# Altium PCB wisp-6-dipole.PcbDoc
Units mil, origin at the board's own origin, x right, y up, seen from the top; angles counter-clockwise.
Board outline 1330 x 5829.72 mil, 4 copper layers (Top Layer, Mid-Layer 1, Mid-Layer 2, Bottom Layer); 84 components, 66 nets, 281 pads, 89 vias.
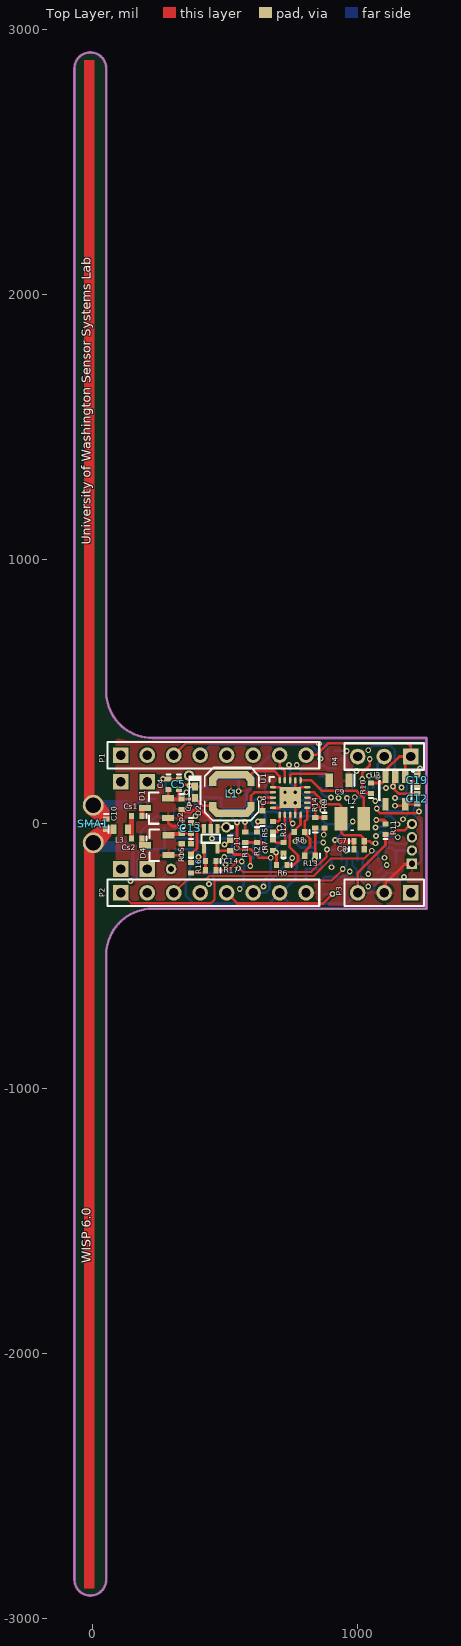
[diagram p0: Top Layer view]
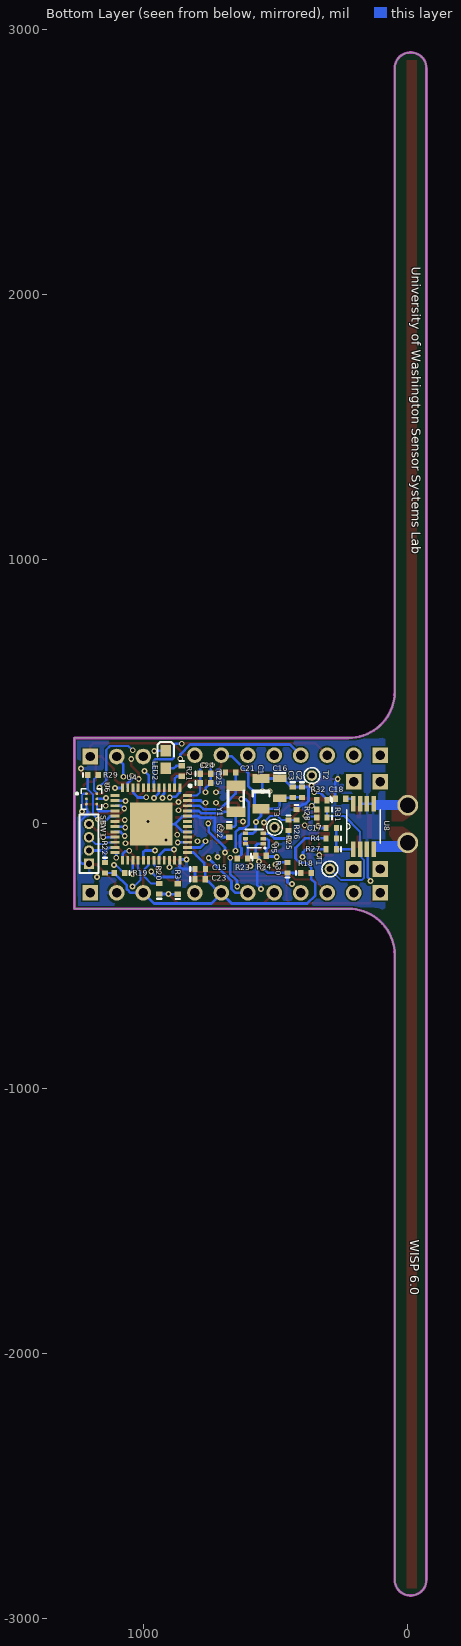
[diagram p1: Bottom Layer view, seen from below]
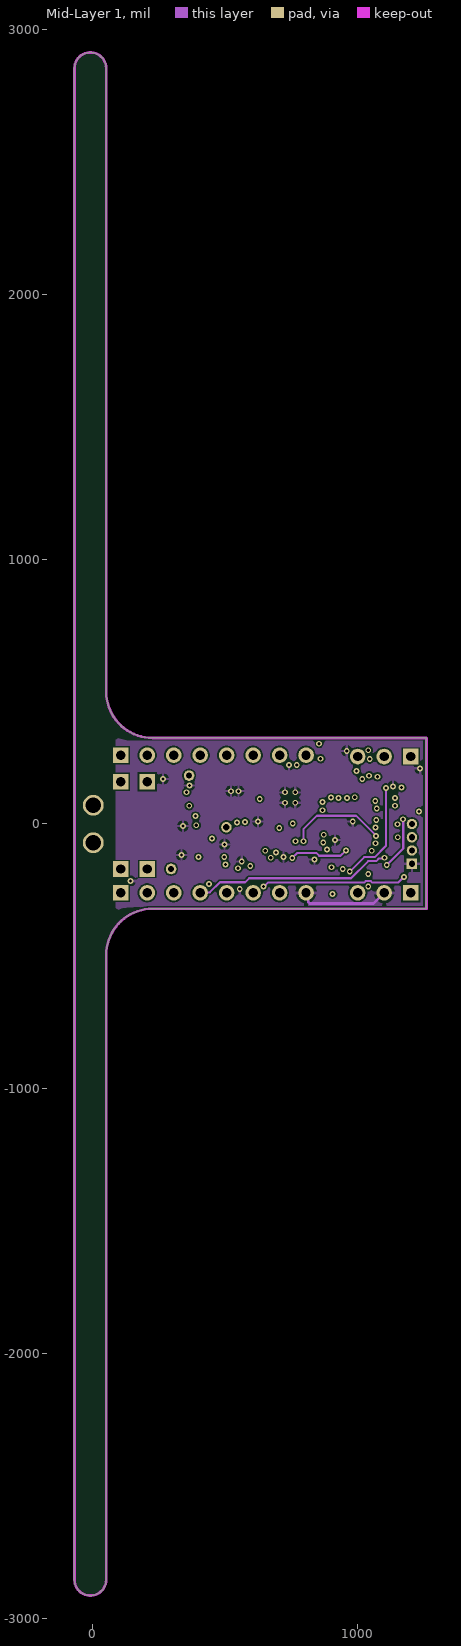
[diagram p2: Mid-Layer 1]
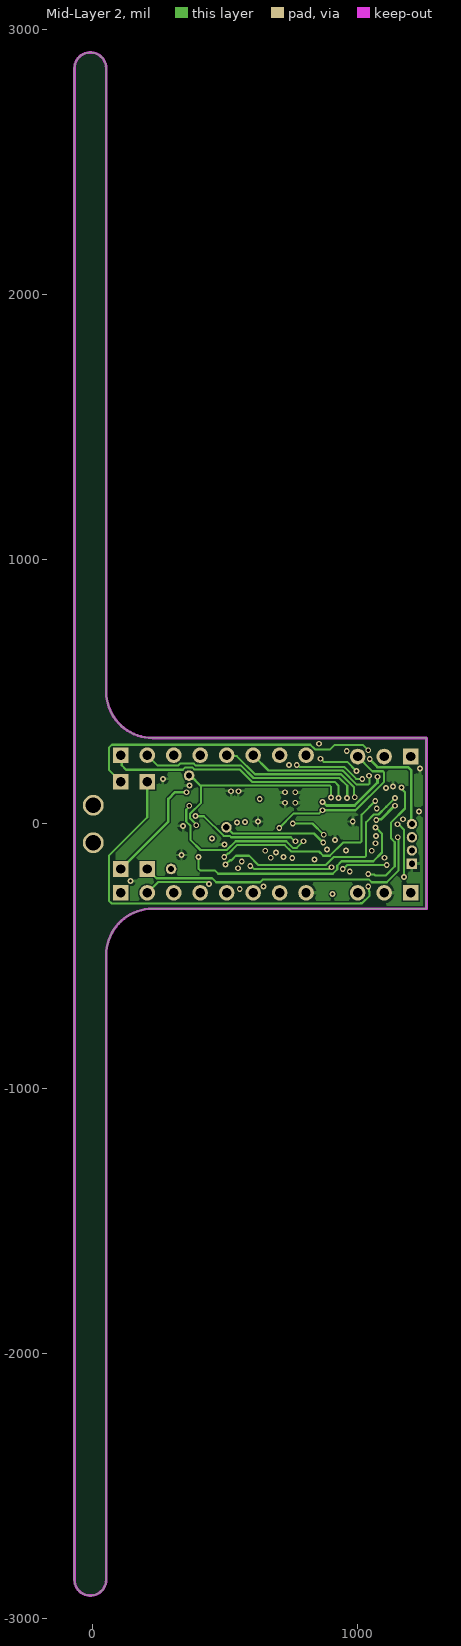
[diagram p3: Mid-Layer 2]

## Layer stack, top to bottom
Top Solder: solder mask 0.4, Solder Resist, Dk 3.5
Top Layer: signal copper 1.4
Dielectric 1: dielectric 12.6, FR-4, Dk 4.8
Mid-Layer 1: signal copper 1.4
Dielectric3: dielectric 12.6, FR-4, Dk 4.8
Mid-Layer 2: signal copper 1.4
Dielectric2: dielectric 12.6, FR-4, Dk 4.8
Bottom Layer: signal copper 1.4
Bottom Solder: solder mask 0.4, Solder Resist, Dk 3.5

## Board outline
-70,-2855 -70,2855 cw(c-10,2855) 50,2855 50,500 ccw(c225,500) 225,325 1260,325 1260,-320 225,-320 ccw(c225,-495) 50,-495 50,-2855 cw(c-10,-2855)

## Design rules (kind name [scope] priority, off if disabled: settings)
BoardOutlineClearance BoardOutlineClearance_1 [(OnLayer('Bottom Overlay') AND OnLayer('Top Overlay'))] p1: gap=8.5 ignorepadtopadclearanceinfootprint=FALSE except(5: Track-OutlineEdge Track-CavityEdge Track-CutoutEdge Track-SplitBarrior Track-SplitContinuation Text-OutlineEdge Text-CavityEdge Text-CutoutEdge Text-SplitBarrior Text-SplitContinuation)
BoardOutlineClearance [Not OnLayer('Bottom Overlay') AND  Not OnLayer('Top Overlay')] p2: gap=8.5 ignorepadtopadclearanceinfootprint=FALSE except(5: Text-OutlineEdge Text-CavityEdge Text-CutoutEdge Text-SplitBarrior Text-SplitContinuation)
Clearance [All] p1: gap=5.98 ignorepadtopadclearanceinfootprint=FALSE except(0: Arc-Hole Track-Hole SMDPad-Hole THPad-Hole Via-Hole Fill-Hole Poly-Hole Region-Hole Text-Hole; 6: SMDPad-SMDPad)
HoleSize [All] p1: absolutevalues=TRUE maxlimit=248.03 minlimit=7.87 maxpercent=80.000 minpercent=20.000
MinimumSolderMaskSliver [All] p1: minsoldermaskwidth=0.59
PolygonConnect [All] p1: connectstyle=Relief reliefconductorwidth=10 reliefentries=4 polygonreliefangle="90 Angle" airgapwidth=10
RoutingVias [All] p1: holewidth=8 width=20 viastyle="Through Hole" minholewidth=8 minwidth=20 maxholewidth=28 maxwidth=50
SilkToSilkClearance [All] p1: silktosilkclearance=0
SilkToSolderMaskClearance [IsPad] p1: minsilkscreentomaskgap=0 clearancetoexposedcopper=TRUE
SolderMaskExpansion [All] p1: expansion=4 istentingtop=FALSE
SupplyNets "Schematic Supply Nets_6" [InNet('3V3')] p1: voltage=0.000
SupplyNets "Schematic Supply Nets_5" [InNet('SENSOR_PWR')] p2: voltage=0.000
SupplyNets "Schematic Supply Nets_4" [InNet('GND')] p3: voltage=0.000
SupplyNets "Schematic Supply Nets_3" [InNet('VBOOST')] p4: voltage=0.000
SupplyNets "Schematic Supply Nets_2" [InNet('2V2')] p5: voltage=0.000
SupplyNets "Schematic Supply Nets_1" [InNet('VREG')] p6: voltage=0.000
SupplyNets "Schematic Supply Nets" [InNet('3V3RF')] p7: voltage=0.000
Width [All] p1: maxlimit=20 minlimit=7 preferedwidth=10
26 further rules are at their usual default settings.

## Classes and differential pairs
component class wisp-6-main: P1 P2 P3 P4 R3 R20
component class U_wisp-6-peripherals: R23 R24 R25 R26 R29 R30 U5 U6
component class U_wisp-6-mcu: C15 C21 C22 C23 C24 C25 LED2 R18 R19 R21 R22 R28 R31 R32 SBW1 U4 Y1
component class U_wisp-6-afe: C1 C2 C3 C4 C5 C6 C7 C8 C9 C10 C11 C12 C13 C14 C16 C17 C18 C19 Cp1 Cp2 Cs1 Cs2 D1 D2 D4 L1 L2 L3 R1 R2 R4 R5 R6 R7 R8 R9 R10 R11 R12 R13 R14 R15 R16 R17 R27 SMA1 T1 T2 T3 U1 U2 U3 U8

## Components (designator, comment, footprint, x,y, rotation, side; value= is the part's Value field where it differs from the comment)
C1 "Generic ceramic capacitor" 1206 555,115 r270 bottom value=220uF
C2 "Generic ceramic capacitor" 0402 400,120.31 r270 bottom value=4.7uF
C3 "Generic ceramic capacitor" 0402 435,120.31 r270 bottom value=0.1uF
C4 "Generic ceramic capacitor" 0402 285,150 r270 top value=0.1uF
C5 "Generic ceramic capacitor" 0402 325,150 r270 top value=4.7uF
C6 "Generic ceramic capacitor" 0402 640,30 r90 top value=10nF
C7 "Generic ceramic capacitor" 0402 1005.31,-65 r0 top value=22uF
C8 "Generic capacitor" 0402 1005.31,-95 r0 top value=DNP
C9 "Generic ceramic capacitor" 0805 930,165 r180 top value=100uF
C10 "Generic capacitor" 0402 50,-0.31 r270 top value=1.2pF
C11 "Generic ceramic capacitor" 0402 519,-81 r270 top value=0.1uF
C12 "Generic ceramic capacitor" 0402 1225,95 r270 top value=1uF
C13 "Generic capacitor" 0402 370,-15.32 r270 top value=33pF
C14 "Generic ceramic capacitor" 0402 445,-140 r180 top value=1nF
C15 "Generic ceramic capacitor" 0402 785,-170 r180 bottom value=0.1uF
C16 "Generic ceramic capacitor" 0805 485,135 r270 bottom value=100uF
C17 "Generic ceramic capacitor" 0402 290,-15 r0 bottom value=0.1uF
C18 "Generic capacitor" 0402 255,95 r180 bottom value=3.3nF
C19 "Generic ceramic capacitor" 0402 1225,165.31 r270 top value=1uF
C21 "Generic ceramic capacitor" 0402 670,195 r180 bottom value=10pF
C22 "Generic ceramic capacitor" 0402 675,-30 r270 bottom value=10pF
C23 "Generic ceramic capacitor" 0402 785.15,-208.85 r180 bottom value=1uF
C24 "Generic ceramic capacitor" 0402 765,190 r180 bottom value=0.1uF
C25 "Generic ceramic capacitor" 0402 765,155 r180 bottom value=1uF
Cp1 "Generic capacitor" 0402 335,75 r270 top value=33pF
Cp2 "Generic capacitor" 0402 335,-55 r270 top value=10pF
Cs1 "Generic capacitor" 0402 165,30 r180 top value=33pF
Cs2 "Generic capacitor" 0402 165,-55 r180 top value=1pF
D1 "SMS7630-005LF" "SOT23 - N" 240,60 r180 top value=1V
D2 "Generic diode - zener" Zener_SOD-523 385,120 r180 top value=DNP
D4 "SMS7630-005LF" "SOT23 - N" 240.95,-80 r180 top value=1V
L1 "SMT shielded inductor" LPS4018 520,105 r180 top value=22uH
L2 "SMT shielded inductor" IND1008 980,20 r180 top value=10uH
L3 "Generic inductor" 0603 105,-20 r0 top value=16nH
LED2 "Generic LED" "Diode - 0603" 915,243.46 r270 bottom value=1.9V
P1 "Header 8" HDR1X8 105,260 r0 top value=DNP
P2 "Header 8" HDR1X8 105,-260 r0 top value=DNP
P3 "Header 3" HDR1X3 1200,-260 r180 top value=DNP
P4 "Header 3" HDR1X3 1200,255 r180 top value=DNP
R1 "Generic resistor" 0402 575,-50 r90 top value=DNP
R2 "Generic resistor" 0402 620,-49.68 r270 top value=0
R3 "Generic resistor" 0402 870,-245.32 r90 bottom value=0
R4 "Generic resistor" 0402 290,-55 r0 bottom value=DNP
R5 "Generic resistor" 0402 680,-10.32 r90 top value=0
R6 "Generic resistor" 0402 713.21,-155 r180 top value=2M
R7 "Generic resistor" 0402 680,-80 r270 top value=7.5M
R8 "Generic resistor" 0402 780.31,-30 r180 top value=7.5M
R9 "Generic resistor" 0402 875,5 r270 top value=8.2M
R10 "Generic resistor" 0402 1050,135 r90 top value=DNP
R11 "Generic resistor" 0402 1105,-19.68 r90 top value=0
R12 "Generic resistor" 0402 720,-90 r90 top value=5.49M
R13 "Generic resistor" 0402 820,-120 r180 top value=4.12M
R14 "Generic resistor" 0402 840,5 r90 top value=4.75M
R15 "Generic resistor" 0402 370,-94.69 r270 top value=560k
R16 "Generic resistor" 0402 370,-165 r270 top value=22k
R17 "Generic resistor" 0402 445,-175 r180 top value=220k
R18 "Generic resistor" 0402 385.32,-185 r180 bottom value=4.7k
R19 "Generic resistor" 0402 1090,-185 r0 bottom value=4.7k
R20 "Generic resistor" 0402 940,-245 r90 bottom value=DNP
R21 "Generic resistor" 0402 855,200 r270 bottom value=33
R22 "Generic resistor" 0402 1145,-165 r270 bottom value=47k
R23 "Generic resistor" 0402 625,-130 r0 bottom value=1M
R24 "Generic resistor" 0402 555.32,-120 r180 bottom value=1M
R25 "Generic resistor" 0402 451,-5 r270 bottom value=1M
R26 "Generic resistor" 0402 421,35 r270 bottom value=1M
R27 "Generic resistor" 0402 289.69,-95 r0 bottom value=0
R28 "Generic resistor" 0402 325,25 r0 bottom value=0
R29 "Generic resistor" 0402 1190,185 r180 bottom value=0
R30 "Generic resistor" 0402 455,-165 r90 bottom value=0
R31 "Generic resistor" 0402 325,55 r0 bottom value=DNP
R32 "Generic resistor" 0402 325,90 r0 bottom value=0
SBW1 "MHDR1X4" MHDR1X4 1205,-150 r90 bottom value=DNP
SMA1 "SMA" "SMA - Hole - 2 Pin" 1,0 r180 top value=DNP
T1 "TP" "TEST POINT - VIA" 295,-170 r180 bottom
T2 "TP" "TEST POINT - VIA" 363,183 r180 bottom
T3 "TP" "TEST POINT - VIA" 504,-12 r180 bottom
U1 "BQ25570" BQ25570 744.68,99.96 r0 top
U2 "TPS7A0218PDBVR" SOT23-5 1142.6,126.57 r180 top value=1.8V
U3 "NCS2200SQ2T2G" SC70-5 445,-55 r180 top
U4 "MSP430FR6969" MSP_QFN48_RGZ_PAD0 970,0 r270 bottom
U5 "DMG1016V-7" "SOT-563 DIODES INCORPORATED" 580.12,-55.32 r0 bottom
U6 "HDC2010YPAR" BGA6C100X50P2X3_HDC2010YPAR 1195,95 r180 bottom
U8 "ADG902BRMZ" SOP65P490X110-8N 168,-9 r90 bottom
Y1 "XTAL 2 pin" "XTAL [3.20mm x 1.50mm]" 650,95 r90 bottom value=32.768kHz

## Footprints (in the part's own frame and the unit in brackets; to place one, negate y for a bottom-side part, rotate by r counter-clockwise, add the part's x,y. Pads: shape width x height; smd on the part's side, far side on the other; paste and mask are expansions set on the pad)
0402 [mm] "Surface Mount; Body 1 x 0.5 mm (LxW typ)"
  rect 0.5x0.6 smd: 1(-0.5,0) 2(0.5,0)
  silkscreen extent -0.95,-0.2 -0.95,0.2, body extent -0.5,-0.25 0.5,0.25, height 0.5
0603 [mm] "Surface Mount; Body 1.6 x 0.8 mm (LxW typ)"
  rect 0.6x0.9 smd: 1(-0.7,0) 2(0.7,0)
  silkscreen extent -1.17,-0.35 -1.17,0.35, body extent -0.8,-0.4 0.8,0.4, height 0.8
0805 [mm] "Surface Mount; Body 2.0 x 1.25 mm (LxW typ)"
  rect 0.7x1.3 smd: 1(-0.95,0) 2(0.95,0)
  silkscreen extent -1.48,-0.55 -1.48,0.55, body extent -1,-0.63 1,0.63, height 1.25
1206 [mm] "Surface Mount; Body 3.2 x 1.6 mm (LxW typ)"
  rect 0.9x1.6 smd: 1(-1.45,0) 2(1.45,0)
  silkscreen extent -0.3,-0.8 0.3,0.8, body extent -1.6,-0.8 1.6,0.8, height 1.1
BGA6C100X50P2X3_HDC2010YPAR [mm]
  round 0.26 smd: A1(-0.5,0.5) A2(0.5,0.5) B1(-0.5,0) B2(0.5,0) C1(-0.5,-0.5) C2(0.5,-0.5)
  silkscreen extent -1.5,-0.99 0.99,0.99
BQ25570 [mm] "Boost Charger"
  oval 0.6x0.24 smd paste-0.025 mask+0.07: 1(-1.65,1) 2(-1.65,0.5) 3(-1.65,0) 4(-1.65,-0.5) 5(-1.65,-1) 11(1.65,-1) 12(1.65,-0.5) 13(1.65,0) 14(1.65,0.5) 15(1.65,1)
  oval 0.24x0.6 smd paste-0.025 mask+0.07: 6(-1,-1.65) 7(-0.5,-1.65) 8(0,-1.65) 9(0.5,-1.65) 10(1,-1.65) 16(1,1.65) 17(0.5,1.65) 18(0,1.65) 19(-0.5,1.65) 20(-1,1.65)
  rect 2.05x2.05 smd paste-1.025 mask+0.07: 21(0,0)
  silkscreen extent -1.97,1.54 -1.54,1.98, body extent -1.82,-1.82 1.83,1.83, height 1.01
"Diode - 0603" [mm] "Diode: Body 1.6 x 0.8 mm (LxW typ)"
  rect 1.1x1 smd: 1(0.85,0) 2(-0.85,0)
  silkscreen extent -1.7,-0.8 -0.3,0.8
HDR1X3 [mm] "Connector; Header; 3 Position"
  rect 1.5x1.5 hole 0.9: 1(0,0)
  round 1.5 hole 0.9: 2(2.54,0) 3(5.08,0)
  silkscreen extent -1.27,-1.27 6.35,1.27
HDR1X8 [mm] "Connector; Header; 8 Position"
  rect 1.5x1.5 hole 0.9: 1(0,0)
  round 1.5 hole 0.9: 2(2.54,0) 3(5.08,0) 4(7.62,0) 5(10.16,0) 6(12.7,0) 7(15.24,0) 8(17.78,0)
  silkscreen extent -1.27,-1.27 19.05,1.27
IND1008 [mm]
  rect 1.24x2.22 smd: 1(-1.09,0) 2(1.09,0)
  silkscreen extent -0.15,-1.1 0.15,1.1
LPS4018 [mil] "Inductor"
  rect 28x31.5 smd: 1(-77.03,37.61) 1(67.97,37.61) 2(-77.03,-54.39) 2(67.97,-54.39)
  rect 35.5x28 smd rot 45: 1(-68.53,55.61) 2(59.47,-72.39)
  rect 123x28 smd: 1(-4.53,64.11) 2(-4.53,-80.89)
  rect 35.5x28 smd rot 135: 1(59.47,55.61) 2(-68.03,-72.89)
  silkscreen extent -107,-109 98,120, body extent -85,-89 76,72, height 71
MHDR1X4 [mm] "Connector; Header; 4 Position"
  rect 1x1 hole 0.6: 1(0,0)
  round 1 hole 0.6: 2(1.27,0) 3(2.54,0) 4(3.81,0)
  silkscreen extent -0.9,-0.9 4.71,0.9
MSP_QFN48_RGZ_PAD0 [mm]
  rect 4.1x4.1 smd: 0(0,0)
  rect 0.85x0.28 smd: 1(-3.475,2.75) 2(-3.475,2.25) 3(-3.475,1.75) 4(-3.475,1.25) 5(-3.475,0.75) 6(-3.475,0.25) 7(-3.475,-0.25) 8(-3.475,-0.75) 9(-3.475,-1.25) 10(-3.475,-1.75) 11(-3.475,-2.25) 12(-3.475,-2.75) 25(3.475,-2.75) 26(3.475,-2.25) 27(3.475,-1.75) 28(3.475,-1.25) 29(3.475,-0.75) 30(3.475,-0.25) 31(3.475,0.25) 32(3.475,0.75) 33(3.475,1.25) 34(3.475,1.75) 35(3.475,2.25) 36(3.475,2.75)
  rect 0.28x0.85 smd: 13(-2.75,-3.475) 14(-2.25,-3.475) 15(-1.75,-3.475) 16(-1.25,-3.475) 17(-0.75,-3.475) 18(-0.25,-3.475) 19(0.25,-3.475) 20(0.75,-3.475) 21(1.25,-3.475) 22(1.75,-3.475) 23(2.25,-3.475) 24(2.75,-3.475) 37(2.75,3.475) 38(2.25,3.475) 39(1.75,3.475) 40(1.25,3.475) 41(0.75,3.475) 42(0.25,3.475) 43(-0.25,3.475) 44(-0.75,3.475) 45(-1.25,3.475) 46(-1.75,3.475) 47(-2.25,3.475) 48(-2.75,3.475)
  silkscreen extent -3.78,3.63 -3.55,3.85, body extent -3.3,-3.3 3.3,3.3, height 1
SC70-5 [mm] "SC70-5"
  rect 0.4x0.92 smd: 1(-0.65,-0.95) 2(0,-0.95) 3(0.65,-0.95) 4(0.65,0.95) 5(-0.65,0.95)
  silkscreen extent -0.9,-0.4 0.9,0.4
"SMA - Hole - 2 Pin" [mm] "SMA port for wisp"
  round 2 hole 1.5: 1(0,1.796) 2(0,-1.796)
  silkscreen extent -1.02,0 1.02,0
SOP65P490X110-8N [mil]
  rect 59x17 smd: 1(-86,38) 2(-86,13) 3(-86,-13) 4(-86,-38) 5(86,-38) 6(86,-13) 7(86,13) 8(86,38)
  silkscreen extent -63,-63 63,63, body extent -96,-59 96,59, height 43
"SOT23 - N" [mm] "SOT23, 3-Leads, Body 2.9x1.3mm, Pitch 0.95mm, Lead Span 2.3mm - Reverse Pinning, IPC Medium Density"
  rect 1.15x0.6 smd: 1(-1.125,0.95) 2(-1.125,-0.95) 3(1.125,0)
  silkscreen extent -0.2,-1.5 0.7,1.5, body extent -0.7,-1.5 0.7,1.5, height 1.1
SOT23-5 [mm] "SOT23-5"
  rect 0.62x1.22 smd: 1(-0.95,-1.31) 2(0,-1.31) 3(0.95,-1.31) 4(0.95,1.31) 5(-0.95,1.31)
  silkscreen extent -1.8,-2 1.55,0.9, body extent -1.55,-0.9 1.55,0.9, height 1
"SOT-563 DIODES INCORPORATED" [mm] "Made from DMG1016V datasheet"
  rect 0.5x0.34 smd: 1(-0.85,0.5) 2(-0.85,0) 3(-0.85,-0.5) 4(0.85,-0.5) 5(0.85,0) 6(0.85,0.5)
  silkscreen extent -1.03,-0.87 0.85,0.93, body extent -0.85,-0.85 0.85,0.85, height 0.61
"TEST POINT - VIA" [mil] "Test Point, 24 mil hole"
  round 40 hole 24: 0(0,0)
  silkscreen extent -30,-30 30,30
"XTAL [3.20mm x 1.50mm]" [mm] "FC-135   crystal - epson eletronics"
  rect 1x1.8 smd: 1(-1.25,0) 2(1.25,0)
  silkscreen extent -0.76,-0.76 0.76,0.76
Zener_SOD-523 [mm] "Zener Diod"
  rect 0.6x0.8 smd paste-0.05: 1(0,-0.55) 2(0,0.55)
  silkscreen extent -0.63,-1.6 0.64,1.2, body extent -0.4,-0.8 0.4,0.8, height 0.72

## Part data
C1: library part C-220uF-6V3-X5R-1206, "CAP CER 220UF 6.3V X5R 1206", Digi-Key Part Number=490-13970-1-ND, Manufacturer="Murata Electronics", Manufacturer Part Number=GRM31CR60J227ME11L, Rating="6.3V, -55~85C", Tolerance=+-20%
C2 C5: library part C-4.7uF-10V-X5R-0402, "CAP CER 4.7UF 10V X5R 0402", Digi-Key Part Number=1276-1482-1-ND, Manufacturer="Samsung Electro-Mechanics", Manufacturer Part Number=CL05A475MP5NRNC, Rating="10V, -55~85C", Tolerance=+-20%
C3 C4 C11 C15 C17 C24: library part C-0.1uF-10V-X5R-0402, "CAP CER 100nF/0.1UF 10V X5R 0402", Digi-Key Part Number=1276-1022-1-ND, Manufacturer="Samsung Electro-Mechanics", Manufacturer Part Number=CL05A104KP5NNNC, Rating="10V, -55C~85C", Tolerance=+-10%
C6: library part C-10nF-50V-X7R-0402, "10000 pF ±10% 50V Ceramic Capacitor X7R 0402 (1005 Metric)", Digi-Key Part Number=1276-1028-1-ND, Manufacturer="Samsung Electro-Mechanics", Manufacturer Part Number=CL05B103KB5NNNC, Rating="50V, -55~125C", Tolerance=+-10%
C7: library part C-22uF-6V3-X5R-0402, "CAP CER 22UF 6.3V X5R 0402", Digi-Key Part Number=1276-7090-1-ND, Manufacturer="Samsung Electro-Mechanics", Manufacturer Part Number=CL05A226MQ5N6J8, Rating="6.3V, -55~85C", Tolerance=+-20%
C8: library part cap, "Ceramic Capacitor (Surface Mount)"
C9 C16: library part C-100uF-6V3-X5R-0805, "CAP CER 100UF 6.3V X5R 0805", Digi-Key Part Number=490-13981-1-ND, Manufacturer="Murata Electronics", Manufacturer Part Number=GRM21BR60J107ME15L, Rating="6.3V, -55~85C", Tolerance=+-20%
C10: library part cap, "Ceramic Capacitor (Surface Mount)", Digi-Key Part Number=712-QSCF500Q1R2A1GV001TCT-ND, Manufacturer="Johanson Technology Inc.", Manufacturer Part Number=QSCF500Q1R2A1GV001T, Rating="50V, -55~150C", Tolerance=+-0.05pF
C12 C19 C23 C25: library part C-1uF-10V-X5R-0402, "CAP CER 1UF 10V X5R 0402", Digi-Key Part Number=1276-1076-1-ND, Manufacturer="Samsung Electro-Mechanics", Manufacturer Part Number=CL05A105KP5NNNC, Rating="10V, -55~85C", Tolerance=+-10%
C13 Cp1 Cs1: library part cap, "Ceramic Capacitor (Surface Mount)", Digi-Key Part Number=712-QSCF500Q330F1GV001TCT-ND, Manufacturer="Johanson Technology Inc.", Manufacturer Part Number=QSCF500Q330F1GV001T, Rating="50V, -55~150C", Tolerance=+-1%
C14: library part C-1nF-50V-C0G-0402, "CAP CER 1000PF 50V C0G/NP0 0402", Digi-Key Part Number=1276-1635-1-ND, Manufacturer="Samsung Electro-Mechanics", Manufacturer Part Number=CL05C102JB5NNNC, Rating="50V, -55~125C", Tolerance=+-5%
C18: library part cap, "Ceramic Capacitor (Surface Mount)", Digi-Key Part Number=490-GRM1555C1H332GE01DCT-ND, Manufacturer="Murata Electronics", Manufacturer Part Number=GRM1555C1H332GE01D, Rating="50V, -55~125C", Tolerance=+-2%
C21 C22: library part C-10pF-50V-C0G-0402, "CAP CER 10PF 50V C0G/NP0 0402", Digi-Key Part Number=1276-1625-1-ND, Manufacturer="Samsung Electro-Mechanics", Manufacturer Part Number=CL05C100DB5NNNC, Rating="10V, -55~125C", Tolerance=+-0.5pF
Cp2: library part cap, "Ceramic Capacitor (Surface Mount)", Digi-Key Part Number=712-QSCF500Q100F1GV001TCT-ND, Manufacturer="Johanson Technology Inc.", Manufacturer Part Number=QSCF500Q100F1GV001T, Rating="50V, -55~150C", Tolerance=+-1%
Cs2: library part cap, "Ceramic Capacitor (Surface Mount)", Digi-Key Part Number=712-QSCF500Q1R0B1GV001TCT-ND, Manufacturer="Johanson Technology Inc.", Manufacturer Part Number=QSCF500Q1R0B1GV001T, Rating="50V, -55~150C", Tolerance=+-0.1pF
D1 D4: "RF diode schottky / SOT-23 Series Pair / Ls=1.5nH", Digi-Key Part Number=863-1699-1-ND, Manufacturer="Skyworks Solutions Inc.", Rating="75mW, -65~150C", Manufacturer Part Number=SMS7630-005LF
D2: library part diode_zener, "Diode - Zener"
L1: library part Ind-22uH-650mA-20%-LPS4018, "22 µH Shielded Drum Core Inductor 650 mA 360mOhm Max Nonstandard", Digi-Key Part Number=2457-LPS4018-223MRC-ND, Manufacturer=Coilcraft, Manufacturer Part Number=LPS4018-223MRC, Rating=650mA, Tolerance=+-20%
L2: library part Ind-10uH-800mA-20%-1008, "FIXED IND 10UH 800MA 625 MOHM", Digi-Key Part Number=732-74479889310CT-ND, Manufacturer="Würth Elektronik", Manufacturer Part Number=74479889310, Rating=800mA, Tolerance=+-20%
L3: library part ind, "Inductor (Surface Mount)", Digi-Key Part Number=490-LQW18AS16NG00DCT-ND, Manufacturer="Murata Electronics", Manufacturer Part Number=LQW18AS16NG00D, Rating="700mA, -40~125C", Tolerance=+-2%, Note="Equivalent to coilcraft 0603CS-16NXGL"
LED2: library part led-red-1V9-0603, "Red 629nm LED Indication - Discrete 1.9V 0603 (1608 Metric)", Color=Red, Digi-Key Part Number=160-1909-1-ND, Manufacturer="Lite-On Inc.", Manufacturer Part Number=LTST-C193KRKT-2A, Rating=2A
P1 P2: "Header, 8-Pin", LatestRevisionDate=17-Jul-2002, LatestRevisionNote="Re-released for DXP Platform.", Publisher="Altium Limited"
P3 P4: "Header, 3-Pin", LatestRevisionDate=17-Jul-2002, LatestRevisionNote="Re-released for DXP Platform.", Publisher="Altium Limited"
R1 R4 R10 R20: library part res, "Chip Resistor (Surface Mount)"
R2 R3 R5 R11 R27 R28 R29 R30 R31 R32: library part R-0-0.063W-*-0402, "RES 0 OHM JUMPER 1/16W 0402", Digi-Key Part Number=311-0.0JRCT-ND, Manufacturer=YAGEO, Manufacturer Part Number=RC0402JR-070RL, Rating=1/16W
  R28 R31 R32: Note=0
R6: library part R-2M-0.063W-1%-0402, "RES 2M OHM 1% 1/16W 0402", Digi-Key Part Number=13-RC0402FR-072MLCT-ND, Manufacturer=YAGEO, Manufacturer Part Number=RC0402FR-072ML, Rating=1/16W, Tolerance=+-1%
R7 R8: library part R-7M5-0.063W-5%-0402, "RES 7.5M OHM 5% 1/16W 0402", Digi-Key Part Number=YAG3315CT-ND, Manufacturer=YAGEO, Manufacturer Part Number=RC0402JR-077M5L, Rating=1/16W, Tolerance=+-5%
R9: library part R-8M2-0.063W-1%-0402, "8.2 MOhms ±1% 0.063W, 1/16W Chip Resistor 0402 (1005 Metric) Moisture Resistant Thick Film", Digi-Key Part Number=13-RC0402FR-078M2LCT-ND, Manufacturer=YAGEO, Manufacturer Part Number=RC0402FR-078M2L, Rating=1/16W, Tolerance=+-1%
R12: library part R-5M49-0.063W-1%-0402, "5.49 MOhms ±1% 0.063W, 1/16W Chip Resistor 0402 (1005 Metric) Moisture Resistant Thick Film", Digi-Key Part Number=13-RC0402FR-075M49LCT-ND, Manufacturer=YAGEO, Manufacturer Part Number=RC0402FR-075M49L, Rating=1/16W, Tolerance=+-1%
R13: library part R-4M12-0.063W-1%-0402, "RES 4.12M OHM 1% 1/16W 0402", Digi-Key Part Number=13-RC0402FR-074M12LCT-ND, Manufacturer=YAGEO, Manufacturer Part Number=RC0402FR-074M12L, Rating=1/16W, Tolerance=+-1%
R14: library part R-4M75-0.063W-1%-0402, "RES 4.75M OHM 1% 1/16W 0402", Digi-Key Part Number=13-RC0402FR-074M75LCT-ND, Manufacturer=YAGEO, Manufacturer Part Number=RC0402FR-074M75L, Rating=1/16W, Tolerance=+-1%
R15: library part R-560k-0.063W-1%-0402, "RES 560K OHM 1% 1/16W 0402", Digi-Key Part Number=311-560KLRCT-ND, Manufacturer=YAGEO, Manufacturer Part Number=RC0402FR-07560KL, Rating=1/16W, Tolerance=+-1%
R16: library part R-22k-0.063W-1%-0402, "RES 22K OHM 1% 1/16W 0402", Digi-Key Part Number=311-22.0KLRCT-ND, Manufacturer=YAGEO, Manufacturer Part Number=RC0402FR-0722KL, Rating=1/16W, Tolerance=+-1%
R17: library part R-220k-0.063W-1%-0402, "RES 220K OHM 1% 1/16W 0402", Digi-Key Part Number=311-220KLRCT-ND, Manufacturer=YAGEO, Manufacturer Part Number=RC0402FR-07220KL, Rating=1/16W, Tolerance=+-1%
R18 R19: library part R-4k7-0.063W-5%-0402, "RES 4.7K OHM 5% 1/16W 0402", Digi-Key Part Number=311-4.7KJRCT-ND, Manufacturer=YAGEO, Manufacturer Part Number=RC0402JR-074K7L, Rating=1/16W, Tolerance=+-5%
R21: library part R-33-0.063W-5%-0402, "33 Ohms ±5% 0.063W, 1/16W Chip Resistor 0402 (1005 Metric) Moisture Resistant Thick Film", Digi-Key Part Number=13-RC0402JR-1333RLCT-ND, Manufacturer=YAGEO, Manufacturer Part Number=RC0402JR-1333RL, Rating=1/16W, Tolerance=+-5%
R22: library part R-47k-0.063W-5%-0402, "RES 47K OHM 5% 1/16W 0402", Digi-Key Part Number=13-RC0402JR-1047KLCT-ND, Manufacturer=YAGEO, Manufacturer Part Number=RC0402JR-1047KL, Rating=1/16W, Tolerance=+-5%
R23 R24 R25 R26: library part R-1M-0.063W-5%-0402, "RES 1M OHM 5% 1/16W 0402", Digi-Key Part Number=311-1.0MJRCT-ND, Manufacturer=YAGEO, Manufacturer Part Number=RC0402JR-071ML, Rating=1/16W, Tolerance=+-5%
SBW1: "Header, 4-Pin", LatestRevisionDate=17-Jul-2002, LatestRevisionNote="Re-released for DXP Platform.", Publisher="Altium Limited"
SMA1: library part "SMA - Hole - 2 Pin", "Two pin SMA connector wisp"
T1 T2 T3: library part "Test Point Via", "Test Point, via no BOM"
U1: "Buck-boost charger Energy Harvesting PMIC 20-VQFN (3.5x3.5)", Digi-Key Part Number=296-37014-1-ND, Manufacturer="Texas Instruments", Manufacturer Part Number=BQ25570RGRT, Rating=-40~125C
U2: "Linear Voltage Regulator IC Positive Fixed 1 Output 200mA SOT-23-5", Digi-Key Part Number=296-TPS7A0218PDBVRCT-ND, Manufacturer="Texas Instruments", Rating="6V in, -40~125C", Manufacturer Part Number=TPS7A0218PDBVR
U3: library part NCS2200, "Comparator Standard (General Purpose) Complementary, Rail-to-Rail SC-88A (SC-70-5/SOT-353)", Digi-Key Part Number=NCS2200SQ2T2GOSCT-ND, Manufacturer=onsemi, Rating="6V max, -40~105C", Manufacturer Part Number=NCS2200SQ2T2G
U4: library part MSP430FR596X_586X_RGZ, "MSP430 CPUXV2 MSP430™ FRAM Microcontroller IC 16-Bit 16MHz 64KB (64K x 8) FRAM 48-VQFN (7x7)", Digi-Key Part Number=296-37918-1-ND, Manufacturer="Texas Instruments", Manufacturer Part Number=MSP430FR5969IRGZT, Rating=-40~85C
U5: "MOSFET N/P-CH 20V 0.87A SOT563", Digi-Key Part Number=DMG1016V-7DICT-ND, Manufacturer="Diodes Incorporated", Rating="530mW, -55~150C", Manufacturer Part Number=DMG1016V-7
U6: "Humidity, Temperature 0 ~ 100% RH I2C ±2% 8 s Surface Mount", Digi-Key Part Number=296-47774-1-ND, Manufacturer="Texas Instruments", Rating=-40~85C, Manufacturer Part Number=HDC2010YPAR
U8: "RF Switch IC General Purpose SPST 2.5GHz 50Ohm 8-MSOP", Digi-Key Part Number=ADG902BRMZ-ND, Manufacturer="Analog Devices", Rating="1.65V~2.75Vcc, -40~85C", Manufacturer Part Number=ADG902BRMZ
Y1: library part XTAL_2pin, "2-pin XTAL", Manufacturer Part Number="FC-135 32.7680KA-A3"

## Free pads (board coordinates)
  rect 59.06x59.06 hole 35.43: 1(105,-170) 1(105,160) 1(205,-170) 1(205,160)

## Via types
v1: diameter 22, hole 12, Top Layer to Bottom Layer, tented both sides, 85 vias
v2: diameter 22, hole 12, Top Layer to Bottom Layer, 4 vias

## Nets (pads, with @x,y where several pads share a name; then routed paths per layer and width w, separated by ;. In a path a pad name is that pad's centre, name@x,y a point inside that pad or via, vN(x,y) a via of type N, cw(c..) or ccw(c..) an arc to the next point about the centre after c; other vN are vias at no path point)
2V2: C12.2 R11.2 U2.5 | length 226.6
  Top Layer w10: v1(1070,15) 1100,15 1105,10 R11.2 ; v1(1141.46,69.22) 1174.22,69.22 U2.5 C12.2@1224.69,75
  Mid-Layer 2 w10: v1(1070,15) 1072.3,17.3 1088.13,17.3 1140.06,69.22 v1(1141.46,69.22)
3V3: C19.2 P1.8 P4.1 R10.2 U2.1 U2.3 | length 835.4
  Top Layer w10: P1.8@806.34,260 P1.8 806.27,261.27 843.67,261.27 887.4,305 1190,305 1200,295 P4.1 ; R10.2 1093.54,154.69 1105.2,166.34 U2.3 1111.54,184.49 1111.54,209.24 1157.29,255 P4.1 ; C19.2 1211.5,159.13 1187.2,159.13 1180,166.34 U2.1 1180,235 P4.1
  Mid-Layer 1 w10: P4.1@1196.33,258.67 P4.1
  Mid-Layer 2 w8: P1.8 P1.8@812.57,260
3V3RF: C7.2 C8.2 L2.2 P4.2 U1.14 | length 797.7
  Top Layer w10: U1.14 834.79,119.65 866.9,87.53 v1@866.9,85.11 ; v1(866.9,82.69) v1@866.9,85.11 ; C8.2 C7.2 ; v1(1067.69,-72.9) 1066.7,-71.91 1051.91,-71.91 1045,-65 C7.2 ; v1@866.9,85.11 877.01,75 930,75 937.84,67.16 937.84,-32.84 947.2,-42.2 1011.35,-42.2 1025,-55.86 C7.2
  Mid-Layer 1 w10: P4.2@1096.09,255 P4.2
  Mid-Layer 2 w10: v1(866.9,82.69) 870.15,82.69 882.84,70 988.81,70 1075,156.19 v1(1075,178.52)
  Bottom Layer w10: v1(1075,178.52) 1075,225.31 1100,250.31 P4.2
ANT: C10.2 L3.1 SMA1.1 U8.4
BITLINE: C13.1 R15.2 R16.1 T2.0 U3.3 U4.1 | length 1045.3
  Top Layer w10: R16.1 370,-115 371.34,-115 376.81,-109.53 376.81,-108.19 392.8,-92.2 392.8,-11.04 390,-8.25 v1(390,-5) ; C13.1 374.84,-0.47 382.23,-0.47 386.75,-5 v1(390,-5) ; U3.3 406.81,-5 v1(390,-5)
  Mid-Layer 2 w8: T2.0 368.2,183 406.2,145 895.12,145 899.8,140.31 v1(899.8,100) ; v1(390,-5) 390,-1.98 366.48,21.53 366.48,38.92 408.45,80.89 408.45,145
  Bottom Layer w10: U4.1@862.24,136.3 862.24,118.21 878.15,102.3 897.51,102.3 v1(899.8,100)
BITLINE_LPF: C14.2 R16.2 R17.2 U3.4 | length 145.5
  Top Layer w10: R16.2 370.64,-184.05 418.24,-184.05 425.32,-176.97 C14.2 420.82,-135.51 420.82,-93.81 U3.4
GND: C1.1 C2.1 C3.1 C4.1 C5.1 C6.1 C7.1 C8.1 C9.1 C10.1 C11.1 C12.1 C14.1 C15.1 C16.1 C17.2 C18.1 C19.1 C21.1 C22.2 C23.1 C24.2 C25.2 Cp1.2 Cp2.2 D1.1 D2.1 D4.1 LED2.2 P2.8 P3.2 R2.1 R12.1 R13.1 R14.1 R17.1 R24.1 R26.1 SBW1.1 SMA1.2 U1.1 U1.5 U1.9 U1.15 U1.17 U1.21 U2.2 U3.2 U4.0 U4.36 U4.41 U4.44 U4.47 U5.1 U6.B1 U6.C1 U8.3 U8.5 U8.6 U8.7 | length 4051.7
  Top Layer w10: D1.1 284.29,5.71 298.49,-8.49 340,-8.49 v1(340,-8.02) 340,15 335,20 Cp1.2@335,53.35 ; C4.1 C5.1@326.97,169.69 ; D4.1 334.58,-117.4 v1(335,-116.98) ; C5.1 C5.1@326.97,169.69 ; v1@335,-115 Cp2.2 ; Cp1.2 336.97,55.31 347.28,45 371.15,45 378.36,52.21 407.39,52.21 445,14.6 U3.2@445,-30.83 ; v1@364.09,140.8 369.32,146.03 380.62,146.03 D2.1 ; v1(364.09,146.03) 361.79,148.33 348.33,148.33 C5.1@326.97,169.69 ; C14.1 R17.1 509.44,-175 543.35,-141.09 v1(562.18,-141.09) ; v1(497.37,-76.98) 499.67,-74.69 503.66,-74.69 517.03,-61.32 C11.1 ; R2.1 620,2.81 623.06,5.87 v1(623.06,9.12) 623.66,9.72 639.4,9.72 C6.1 ; U1.5 705.32,60.59 v2(725,80.28) ; U1.1 705.32,139.33 v2(725,119.65) ; v1(720,-125) R12.1 ; U1.9 v2(764.37,80.28) ; U1.17 v2(764.37,119.65) 784.06,139.33 U1.15 ; v1(837.03,-134.02) 838.36,-132.69 838.36,-121.33 R13.1 ; R13.1@840,-120 R14.1 ; v1(913.94,-60.72) 917.19,-60.72 921.47,-65 C7.1 C8.1 ; P3.2 1105.95,-254.05 1105.95,-222.98 1176.17,-152.75 1202.25,-152.75 SBW1.1 ; v1(1134.02,141.92) 1134.02,138.67 1139.29,133.4 1139.29,130.42 1153.84,115.87 1154.02,115.87 1155.21,114.68 C12.1 ; C19.1 1226.97,185 1231.81,189.84 1231.81,202.54 1235.66,206.39 v1(1235.66,209.64)
  Top Layer w15: v1(1134.02,141.92) 1134.02,143.81 1137.89,147.69 1137.89,173.44 U2.2
  Top Layer w20: SMA1.2@-3.29,75 SMA1.2
  Mid-Layer 1 w10: P2.8 813.32,-268.32 813.32,-294.66 819.17,-300.51 1059.49,-300.51 P3.2
  Bottom Layer w8: SBW1.1 1230,-150 1240,-140 1240,8.28 1210.98,37.29 1210.98,56.09 1214.26,59.36 1214.26,74.89 U6.C1 U6.B1
  Bottom Layer w10: U8.5 U8.6 U8.7 ; v1(141.53,-215) 141.53,-211.75 151.5,-201.78 151.5,-98.5 U8.3 ; v1(265,170) 265,167.83 274.69,158.14 C18.1 ; C17.2 329.77,-15 336.75,-8.02 v1(340,-8.02) ; v1(364.09,146.03) 364.09,140.8 367.02,143.74 369.63,143.74 373.37,140 C2.1 C3.1 439.84,144.84 445.63,144.84 464.41,163.62 473.19,172.4 C16.1 485.31,172.09 C1.1 550,167.09 v1@550,130.03 ; v1@367.51,137.39 375.77,129.12 375.77,87.44 389.55,73.67 400.05,73.67 419.35,54.37 R26.1@421,54.37 ; v1(521.94,124.02) v1(550,124.02) ; U5.1 569.14,-75 575,-80.86 R24.1 568.04,-120 562.95,-125.09 562.95,-140.32 v1(562.18,-141.09) 562.18,-144.34 570.42,-152.58 570.42,-176.21 570,-176.62 570,-229.63 v1(554.6,-245.03) ; C22.2 700.32,-49.68 730,-20 730,24.02 786.62,24.02 792.13,29.53 U4.44 833.7,29.02 851.79,29.02 880.15,0.66 880.15,-0.66 ; v1(740,222.94) 740,219.69 745.31,214.38 C24.2 ; C24.2@742.3,188.02 745.31,185 C25.2@745.31,150 ; C25.2 745.31,153.03 750.16,148.19 752.13,148.19 764.13,136.18 764.13,119.88 v2(764.37,119.65) ; v2(764.37,80.28) 766.67,82.57 777.27,82.57 783.28,88.58 U4.47 ; C23.1@804.68,-208.11 C15.1 855.87,-170 861.73,-164.14 U4.36 861.73,-134.53 861.22,-134.02 v1(837.03,-134.02) ; U4.41 833.7,-29.02 851.79,-29.02 880.15,-0.66 ; v1(913.94,-60.72) 914.28,-60.72 U4.0@974.34,-0.66 ; LED2.2 915.6,276.33 v1(958.67,276.33) ; v1(981.52,10) U4.0@983.26,8.26 ; U4.0@985,10 U4.0@983.26,8.26 ; 880.15,-0.66 U4.0@974.34,-0.66 ; U4.0@974.34,-0.66 U4.0@983.26,8.26
I2C_SCL: P2.2 R18.1 R30.1 U4.32 | length 938.5
  Top Layer w8: v1(548.43,-167.1) 552.22,-167.1 566.17,-181.05 824.89,-181.05 882.23,-123.71 882.23,-98.1 v1(883.61,-96.71)
  Mid-Layer 2 w8: P2.2 245.51,-219.49 430.27,-219.49 v1(437.89,-227.11)
  Bottom Layer w10: P2.2 P2.2@205,-255 ; R18.1 405.16,-184.84 434.84,-184.84 435,-184.69 R30.1 ; v1(437.89,-227.11) 438.77,-226.23 449.14,-226.23 455,-220.37 R30.1 ; v1(548.43,-167.1) 546.83,-167.1 529.25,-184.69 R30.1 ; v1(883.61,-96.71) 918.47,-96.71 939.96,-118.21 U4.32@939.96,-136.3
I2C_SDA: P2.1 R19.1 R29.1 U4.31 | length 1603
  Top Layer w8: P2.1 144.51,-299.51 445.31,-299.51 458.87,-285.95 458.87,-217.7 463.56,-213.02 902.87,-213.02 943.67,-172.22 v1(943.67,-170.53)
  Mid-Layer 1 w8: v1(1110,-155) 1172.32,-92.68 1172.32,17.23 v1(1171.53,18.02)
  Mid-Layer 2 w8: P2.1 110,-260 P2.1@113.67,-256.33 ; v1(943.67,-170.53) 945.14,-170.53 960.67,-155 v1(1110,-155)
  Bottom Layer w8: v1(943.67,-170.53) 943.67,-169.98 958.65,-155 U4.31@958.65,-136.35 ; R19.1@1075.32,-185 1075.32,-183.03 1100.67,-157.68 1107.32,-157.68 v1(1110,-155) ; v1(1171.53,18.02) 1190.42,36.9 1190.42,111.78 1209.68,131.04 R29.1
LED2: R21.2 U4.2 | length 65.1
  Bottom Layer w10: R21.2 873.25,180.31 881.42,172.15 U4.2
NetC6_2: C6.2 U1.4 | length 66.6
  Top Layer w10: C6.2 640,73.91 646.37,80.28 U1.4
NetC9_2: C9.2 U1.18 | length 186.4
  Top Layer w10: U1.18 744.69,183.83 750.54,189.69 879.72,189.69 892.6,176.81 C9.2
NetC11_2: C11.2 U3.5 U4.34 | length 517.4
  Top Layer w10: U3.5 470.59,-97.81 473.46,-100.69 520.97,-100.69 525.81,-105.53 525.81,-107.5 533.31,-115 585,-115 595.31,-125.31 595.31,-157.95 v1(594.49,-158.77)
  Mid-Layer 2 w8: v1(594.49,-158.77) 598.28,-158.77 609.87,-170.35 890.31,-170.35 897.37,-163.29 v1(901.16,-163.29)
  Bottom Layer w10: v1@901.13,-163.26 U4.34
NetC13_2: C13.2 Cp2.1 D4.2 R15.1 | length 75.1
  Top Layer w10: Cp2.1 369.68,-35.32 C13.2 R15.1
NetC17_1: C17.1 R4.1 R27.1 U8.1 | length 144.1
  Bottom Layer w10: U8.1 R27.1 270.31,-94.69 C17.1
NetC18_2: C18.2 U8.8 | length 45.3
  Bottom Layer w10: U8.8 206,91.5 209.5,95 C18.2
NetC21_2: C21.2 U4.46 Y1.2 | length 292.1
  Bottom Layer w10: C21.2@650.8,195 650.8,115.39 689.73,76.46 689.98,76.46 696.42,70.02 696.42,69.77 710.2,55.98 773.29,55.98 786.2,68.9 U4.46
NetC22_1: C22.1 U4.45 Y1.1 | length 266.9
  Bottom Layer w10: C22.1 674.69,-10 655.86,-10 650,-4.14 Y1.1 694.21,45.79 700,40 780,40 789.21,49.21 U4.45
NetCs1_1: Cs1.1 D1.3
NetCs1_2: Cs1.2 Cs2.2 L3.2
NetCs2_1: Cs2.1 D4.3
NetL1_2: L1.2 U1.20 | length 224.7
  Top Layer w10: L1.2@510,185 595.14,185 610.14,200 685,200 705.32,179.69 U1.20
NetL2_1: L2.1 U1.16 | length 344.7
  Top Layer w10: U1.16 825.08,164.92 864.92,125.08 996.01,125.08 1022.91,98.18 L2.1
NetLED2_1: LED2.1 R21.1 | length 64.3
  Bottom Layer w10: R21.1 855.32,220 875,220 885,210 LED2.1
NetP2_5: P2.5 R3.1 R20.1 | length 501.6
  Top Layer w10: P2.5 545.51,-300.51 869.49,-300.51 v1(905,-265)
  Bottom Layer w10: R3.1 v1(905,-265) 905.32,-264.68 R20.1
NetR1_1: R1.1 R2.2 U1.3 | length 404.9
  Top Layer w10: R1.1 619.69,-69.68 620,-70 640,-70 650,-80 650,-100.07 v1(651.13,-101.2) ; v1(630,95) 633.25,95 638.21,99.96 U1.3
  Mid-Layer 2 w8: v1(630,95) v1@631.92,93.08
  Bottom Layer w10: v1(630,95) 629.12,94.12 614.12,94.12 601.08,81.08 601.08,-1.08 617.26,-17.26 637.26,-17.26 651.13,-31.13 v1(651.13,-101.2)
NetR5_2: R5.2 U1.6 | length 47.5
  Top Layer w10: R5.2 680.63,10 700,10 705.32,15.32 U1.6
NetR6_1: R6.1 R8.2 U1.10 | length 252
  Top Layer w10: R6.1 757.74,-155 774.55,-138.18 774.55,-118.99 742.9,-87.34 742.9,-43.79 784.02,-2.68 784.02,8.15 784.06,8.19 U1.10
NetR6_2: R6.2 R7.2 R9.2 U1.8 | length 395.1
  Top Layer w10: R7.2 681.93,-99.68 686.78,-104.53 687.79,-104.53 v1(691.2,-107.94) ; R6.2 693.52,-130.03 ; 693.5,-130 v1@693.5,-109.5 ; U1.8 744.69,11.73 754.45,1.97 v1(754.45,1.8) ; v1(871.55,-40.46) 873.28,-38.74 873.28,-16.41 R9.2
  Mid-Layer 2 w8: v1(754.45,1.8) 829.29,1.8 v1(871.55,-40.46)
  Bottom Layer w10: v1(691.2,-107.94) 691.2,-89.54 752.98,-27.76 752.98,0.33 v1(754.45,1.8)
NetR7_1: R7.1 R12.2 U1.7 | length 152.2
  Top Layer w10: R7.1@681.97,-60.31 691.97,-70.32 R12.2 721.97,-70.32 726.81,-65.47 726.81,-1.65 725,0.16 U1.7
NetR8_1: R8.1 R13.2 U1.11 | length 201
  Top Layer w10: R13.2 800.32,-104.68 820,-85 820,-55 800,-35 R8.1 800,-3.19 800.04,-3.15 800.04,10.04 809.65,19.65 U1.11
NetR9_1: R9.1 R14.2 U1.12 | length 109.1
  Top Layer w8: U1.12 819.72,80.28 840,60 R14.2
  Top Layer w10: R14.2 R9.1
NetR23_1: R23.1 U5.5 U5.6 | length 79.6
  Bottom Layer w10: R23.1 605.32,-80.81 611.12,-75 U5.6 U5.5
NetR24_2: R24.2 U4.14 U5.2 | length 917.2
  Mid-Layer 2 w8: v1(496,-125) 509.05,-111.95 511.85,-111.95 543.81,-80 725,-80 748.98,-103.98 853.98,-103.98 870,-120 895,-120 945,-70 1010.31,-70 1015,-65.31 1015,35 v1(1066.63,86.63)
  Bottom Layer w10: v1(496,-125) 498.3,-122.7 532.93,-122.7 R24.2 535.63,-96.73 525.83,-86.93 525.83,-63.07 532.26,-56.63 545.33,-56.63 U5.2 ; v1(1066.63,86.63) 1068.07,88.07 U4.14@1106.3,88.07
NetR25_1: R25.1 R26.2 U4.17 | length 1313.5
  Top Layer w10: v1(544,6) 544,-83.14 555.86,-95 595,-95 627.09,-127.09 670.79,-127.09 v1(671.51,-127.82)
  Mid-Layer 1 w8: v1(644.83,-235.98) 646.37,-235.98 661.86,-220.49 1026.36,-220.49 1031.4,-215.44 1048.79,-215.44 1053.83,-220.49 1154.51,-220.49 v1(1175,-200)
  Mid-Layer 2 w8: v1(1151,-1) 1154.79,-1 1175,-21.21 v1(1175,-200)
  Bottom Layer w8: R26.2 421.32,15 450.69,15 R25.1 476.28,14.68 491.58,29.98 520.02,29.98 v1(544,6)
  Bottom Layer w10: v1(644.83,-235.98) 645.95,-234.87 645.95,-214.05 671.51,-188.49 v1(671.51,-127.82) ; U4.17@1106.81,29.02 1125.42,29.02 1148.7,5.73 1148.7,1.3 v1(1151,-1)
NetR25_2: R25.2 U5.3 | length 135.7
  Bottom Layer w10: R25.2 450.5,-25.19 450.5,-54.5 v1(450,-55) 504.82,-55 522.5,-37.32 544.33,-37.32 U5.3@546.65,-35
NetR27_2: R27.2 U4.19 | length 1042.7
  Mid-Layer 2 w8: v1(398.84,-124.76) 398.84,-168.78 405.06,-175 460,-175 473.08,-188.08 906.04,-188.08 922.68,-171.45 922.68,-157.32 939.08,-140.92 1059,-140.92 1091.98,-107.94 1091.98,-36.92 v1(1067.97,-12.91)
  Bottom Layer w10: R27.2 384.76,-95 396.54,-106.78 396.54,-122.46 v1(398.84,-124.76) ; v1(1067.97,-12.91) 1071.22,-12.91 1074.29,-9.84 U4.19
NetR28_1: R28.1 R31.1 T1.0 U8.2 | length 509.4
  Bottom Layer w7: U8.2 176,-100 176,-126.53 165.99,-136.54 165.99,-203.46 174.53,-212 253,-212 T1.0 ; R28.1@305.31,30 R31.1@305.31,60
  Bottom Layer w8: U8.2 181,-29 240,30 R28.1@305.31,30
NetR29_2: R29.2 U6.A2 | length 82.9
  Bottom Layer w8: R29.2 1170.31,183.03 1176.16,177.19 1178.13,177.19 1186.64,168.68 1186.64,128.59 1175.74,117.7 1175.74,115.11 U6.A2
NetR30_2: R30.2 U6.B2 | length 931.6
  Mid-Layer 2 w8: v1(500.78,-152.57) 501.77,-152.57 517.54,-136.8 523.2,-136.8 540,-120 590,-120 625,-155 879.78,-155 909.84,-124.93 1026.81,-124.93 1031.92,-119.82 1031.92,6.6 1061.32,35.99 1078.62,35.99 1108.01,65.39 1108.01,65.45 v1(1140.47,97.91)
  Bottom Layer w8: v1(1140.47,97.91) 1142.95,95.43 1174.89,95.43 U6.B2
  Bottom Layer w10: R30.2 455.32,-145 481.81,-145 487.09,-150.28 498.48,-150.28 v1(500.78,-152.57)
NetU4_16: U4.16 U6.C2 | length 91.8
  Bottom Layer w8: U4.16 1107.01,49.02 1132,49.02 1132.77,48.24 1168.24,48.24 1175.32,55.32 U6.C2
P3.0: P1.1 U4.4 | length 987.9
  Mid-Layer 2 w8: P1.1 108.67,256.33 108.67,221.33 125,205 339,205 347.98,213.98 375.36,213.98 382.84,206.5 553.5,206.5 601.02,158.98 913.04,158.98 927.69,144.33 v1(927.69,97.69)
  Bottom Layer w10: U4.4@921.3,137.32 U4.4 921.3,136.3 921.3,114.95 925.72,110.53 925.72,99.67 v1(927.69,97.69)
P3.1: P1.2 U4.5 | length 903
  Mid-Layer 2 w8: P1.2 244.51,220.49 321.37,220.49 328.85,227.97 381.15,227.97 388.63,220.49 559.74,220.49 606.24,173.98 931.02,173.98 960.49,144.51 960.49,98.18 v1(960,97.69)
  Bottom Layer w10: U4.5@940.98,136.3 940.98,116.71 v1(960,97.69)
P3.2: P1.3 U4.6 | length 830.9
  Top Layer w10: P1.3 350,305 852.34,305 v1(854.32,303.02)
  Bottom Layer w10: v1(854.32,303.02) 854.94,303.63 878.47,303.63 884.33,297.77 884.33,250.73 890.77,244.29 954.03,244.29 960.16,238.16 U4.6
P3.3: P1.4 U4.7 | length 728.1
  Mid-Layer 2 w8: v1(860,246.51) 860,246.3 871.69,234.62 960.75,234.62 v1(995.22,200.15)
  Bottom Layer w10: P1.4 445.51,300.51 822.58,300.51 859.9,263.19 859.9,246.61 v1(860,246.51) ; U4.7 979.84,184.77 v1(995.22,200.15)
P3.4: pad.1@105,160 U4.27 | length 1925
  Mid-Layer 2 w8: pad.1@105,160 60,205 60,288.18 71.34,299.51 821.37,299.51 838.85,282.03 896.08,282.03 913.04,299 1019.71,299 v1(1040.04,278.67) ; v1(1040,-189.02) 1041.98,-191 1063,-191 1067,-195 1105,-195 1140,-160 1140,-68.34 1126.38,-54.72 1126.38,6.09 1178.98,58.7 1178.98,120.17 1165.66,133.5 v1(1165.66,137.28)
  Bottom Layer w8: v1@1040.04,280.04 1042.25,280.04 1056.72,294.51 1125.49,294.51 1140,280 1140,165.61 1165.66,139.96 v1(1165.66,137.28)
  Bottom Layer w10: pad.1@105,160 pad.1@108.67,163.67 ; U4.27@1038.9,-137.83 1039.41,-138.35 1039.41,-188.42 v1(1040,-189.02) ; v1(1040.04,278.67) v1@1040.04,280.04
P3.5: pad.1@205,160 U4.28 | length 1666.2
  Mid-Layer 2 w8: pad.1@205,160 205,25 60,-120 60,-290 70.51,-300.51 1009.49,-300.51 1010.49,-299.51 1016.37,-299.51 1045,-270.88 1045,-255.43 1042.77,-253.2 1042.77,-239.1 v1(1040.09,-236.43)
  Bottom Layer w8: U4.28 1019.21,-170.79 1010,-180 1010,-210 1036.43,-236.43 v1(1040.09,-236.43)
P3.6: P2.6 U4.29 | length 520.8
  Mid-Layer 1 w8: v1(752.57,-128.09) 770.66,-110 845,-110 855,-120 935,-120 954.4,-100.6 v1(955.6,-100.6)
  Bottom Layer w10: P2.6 651.91,-260 666.82,-245.09 666.82,-215.79 752.57,-130.04 v1(752.57,-128.09) ; v1(955.6,-100.6) 956.2,-100 993.67,-100 999.53,-105.86 U4.29
P3.7: R20.2 U4.30 | length 134.2
  Bottom Layer w8: R20.2 969.69,-225.31 995,-200 995,-170 980.35,-155.35 U4.30@980.35,-137.39
RST: R22.1 SBW1.2 U4.23 | length 149.6
  Bottom Layer w10: U4.23@1107.32,-89.09 1129.09,-89.09 1140,-100 ; R22.1 1145,-105 1140,-100 ; SBW1.2 1140,-100
RX: T3.0 U3.1 U4.39 | length 464
  Top Layer w8: U3.1 470.59,-15.87 474.46,-12 T3.0
  Mid-Layer 2 w8: T3.0 528.02,-36.02 835.28,-36.02 869.26,-70 v1(870,-70)
  Bottom Layer w10: U4.39 833.35,-69.06 869.06,-69.06 v1(870,-70)
SENSOR_PWR: U4.15 U6.A1 | length 292.9
  Top Layer w10: v1(1071.92,58.98) 1074.22,56.68 1074.22,51.61 1085.83,40 1221.32,40 1228.72,47.4 v1(1231.97,47.4)
  Bottom Layer w8: U6.A1 1215.11,114.26 1225.74,114.26 1231.93,108.07 v1@1231.93,47.44
  Bottom Layer w10: v1(1071.92,58.98) 1074.29,58.98 1083.78,68.47 U4.15@1106.38,68.47
SMCLK: R3.2 U4.12 | length 558.2
  Top Layer w10: v1(970,-180) v1@972.03,-182.03
  Mid-Layer 1 w8: v1(970,-180) 1024.92,-125.08 1064.11,-125.08 1107.16,-82.02 1107.16,135.64 v1(1106.63,136.18)
  Bottom Layer w10: R3.2 870,-205.86 875.86,-200 950,-200 v1(970,-180) ; U4.12 1078.27,136.69 1078.78,136.18 v1(1106.63,136.18)
SPI_CS: P1.5 U4.10 | length 645.8
  Mid-Layer 2 w8: P1.5 508.67,256.33 543.67,256.33 612.03,187.97 937.03,187.97 986.18,138.82 986.18,103.82 v1(988.86,101.14)
  Bottom Layer w10: v1(988.86,101.14) 990,100 1020.18,100 1038.39,118.21 U4.10@1038.39,136.3
SPI_MISO: P2.3 U4.25 | length 868.1
  Top Layer w8: P2.3 355,-210 425.32,-210 438.29,-197.03 832.97,-197.03 900,-130 1025.77,-130 1052.91,-102.87 v1(1052.91,-101)
  Bottom Layer w10: v1(1052.91,-101) 1055,-103.09 1068.09,-103.09 1077.76,-112.76 U4.25@1077.76,-136.3
SPI_MOSI: P2.4 U4.24 | length 775.8
  Mid-Layer 1 w8: P2.4 406.84,-258.16 441.84,-258.16 480,-220 575,-220 590,-205 975,-205 1039.94,-140.06 1070.31,-140.06 1079.98,-130.39 1099.2,-130.39 v1(1101.88,-127.72)
  Bottom Layer w10: v1(1101.88,-127.72) 1101.88,-108.78 1102.39,-108.27 U4.24
SPI_SCK: P1.6 U4.11 | length 569
  Mid-Layer 2 w8: P1.6 663.05,201.95 942.82,201.95 944.78,200 945,200 996.46,148.54 1040.31,148.54 1045,153.23 1045,180.76 v1(1043.4,182.35)
  Bottom Layer w10: v1(1043.4,182.35) 1043.4,170.08 1058.07,155.42 U4.11@1058.07,137.32
TEST: SBW1.3 U4.22 | length 111
  Bottom Layer w7: U4.22@1107.32,-69.41 1133.14,-69.41 1139.55,-75.82 1179.18,-75.82 SBW1.3
TX_GPIO: R28.2 U4.38 | length 537.9
  Mid-Layer 2 w8: v1(387.47,30.23) 388.26,29.44 419.08,29.44 493.53,-45.02 517.24,-45.02 522.22,-50 747.8,-50 763.23,-65.44 v1(764.89,-65.44)
  Bottom Layer w8: R28.2@348.31,26.37 349.56,27.61 384.86,27.61 v1(387.47,30.23)
  Bottom Layer w10: v1(764.89,-65.44) 764.89,-68.68 777.18,-80.98 777.18,-81.51 784.25,-88.58 U4.38
TX_SERIAL: R31.2 R32.2 U4.20 | length 1083.1
  Mid-Layer 1 w8: v1(795,-65) 795,-20 845.98,30.98 994.02,30.98 v1@1069.84,-44.84
  Mid-Layer 1 w10: v1(1069.84,-45) v1@1069.84,-44.84
  Mid-Layer 2 w8: v1(363.42,68.71) 363.42,64.92 352.5,54 352.5,9.16 369.02,-7.36 369.02,-60.97 406.02,-97.97 506.06,-97.97 539.03,-65 730,-65 755,-90 770,-90 v1(795,-65)
  Bottom Layer w8: R31.2@344.69,60 347.72,60 353.74,66.03 360.74,66.03 v1(363.42,68.71) ; R32.2 344.69,88.03 361.29,71.42 v1@361.29,68.71
  Bottom Layer w10: v1(1069.84,-45) 1070,-45 1085.47,-29.53 U4.20
UART_RX: pad.1@205,-170 U4.21 | length 1168.2
  Mid-Layer 2 w8: pad.1@205,-170 240,-205 450.1,-205 465.1,-220 631.14,-220 641.14,-210 1043.35,-210 1053.35,-220 1110,-220 1153.98,-176.02 1153.98,-52.65 v1(1151.34,-50)
  Bottom Layer w10: U4.21 1107.2,-49.61 1150.94,-49.61 v1(1151.34,-50)
UART_TX: pad.1@105,-170 R32.1 | length 480.8
  Mid-Layer 2 w10: pad.1@105,-170 285,10 285,95 310,120 v1(353.79,120.01)
  Bottom Layer w10: R32.1 305.31,91.97 331.06,117.72 351.49,117.72 v1(353.79,120.01)
V_BATOK_RF: P4.3 R5.1 U1.13 | length 739.6
  Top Layer w8: U1.13 819.82,99.96 866.91,52.87 v1(866.91,52.06)
  Top Layer w10: R5.1 695,-30 701.5,-23.5 701.5,-17.33 v1(703.8,-15.03)
  Mid-Layer 2 w8: v1(703.8,-15.03) 758.83,40 854.84,40 v1(866.91,52.06) 992.06,52.06 1100,160 1100,194.82 1095.31,199.5 1055.5,199.5 P4.3
VBOOST: C1.2 C2.2 C3.2 C16.2 P1.7 R1.2 R23.2 U1.19 U5.4 | length 880.2
  Top Layer w10: v1(574.45,7.97) 574.73,7.7 574.73,-30.04 R1.2 ; P1.7 705,218.98 725,198.98 U1.19
  Bottom Layer w10: C2.2 C3.2 436.52,99.11 483.48,99.11 C16.2 485,65 492.09,57.91 C1.2 ; R23.2 644.68,-128.03 639.84,-123.19 637.87,-123.19 629.15,-114.46 629.15,-92.2 634.41,-86.93 634.41,-43.38 627.98,-36.95 614.9,-36.95 U5.4 585.63,-35.63 574.45,-24.45 v1(574.45,7.97) 574.45,10.55 555,30 C1.2 ; P1.7 701.33,256.33 666.33,256.33 656.01,246.01 603.58,193.58 603.58,143.58 580,120 580,70.63 567.28,57.91 C1.2
Vrect: C4.2 C5.2 Cp1.1 D1.2 D2.2 L1.1 U1.2 | length 442
  Top Layer w10: D1.2 285,98.11 C4.2 ; C5.2 325,105.39 328.19,102.2 328.19,99.53 333.03,94.68 381.33,94.68 D2.2 414.21,69.14 452.03,69.14 480.37,40.8 L1.1@549.92,40.8 ; L1.1@597.03,67.39 597.28,67.64 597.28,107.28 609.65,119.65 U1.2
VREG: C15.2 C23.2 C24.1 C25.1 P2.7 P3.3 R4.2 R10.1 R11.1 R18.2 R19.2 R22.2 SBW1.4 U4.37 U4.48 | length 2820.2
  Top Layer w10: P3.3 1000,-185 1105,-80 R11.1 1130.88,-39.37 1147.26,-22.98 1177.95,-22.98 1200.94,0 SBW1.4 ; v1(1045.42,245) 1045.42,220.42 1017.33,192.32 v1(1017.33,170.53) 1017.33,132.68 1034.69,115.31 R10.1
  Mid-Layer 2 w8: v1(770,222.94) 773.79,222.94 780.79,215.94 948.62,215.94 950.32,214.23 950.77,214.23 994.48,170.52 v1(1017.33,170.53)
  Mid-Layer 2 w10: 1053.4,236.6 1075,215 1082.71,215 1083.22,214.49 1190.51,214.49 1203.02,201.98 SBW1.4@1203.02,0
  Bottom Layer w8: v1(770,222.94) 784.68,208.25 C24.1 C25.1 784.68,150 785.35,149.33 785.35,119.65 796.73,108.27 U4.48 ; R19.2 1109.84,-184.84 1145.64,-184.84 R22.2@1145.79,-184.69
  Bottom Layer w10: R4.2 310.23,-54.46 389.46,-54.46 425,-90 425,-129.69 407.94,-146.74 383.98,-146.74 365.63,-165.1 R18.2 365.63,-207.84 350,-223.47 350,-270 380.51,-300.51 665.74,-300.51 704.38,-261.88 705,-261.25 P2.7 711.68,-260 756.02,-215.66 760.62,-215.66 765.39,-210.89 765.39,-172.56 770.16,-167.79 770.16,-147.56 809.96,-107.76 U4.37@832.68,-107.76 ; P2.7@705,-262.5 743.01,-300.51 959.49,-300.51 P3.3 1047.61,-260 1059.49,-248.12 1059.49,-247.97 1062.08,-245.38 1062.08,-232.61 1102.87,-191.81 1104.84,-191.81 1109.69,-186.97 R19.2
pads on no net: P3.1 U2.4 U4.3 U4.8 U4.9 U4.13 U4.18 U4.26 U4.33 U4.35 U4.40 U4.42 U4.43

## Polygon pours and split planes (outlines as drawn)
GND on Mid-Layer 1 "GND_L02_P009" (solid, remove dead copper, pour order 9): 85.87,327.12 85.87,-324.13 85.82,-327 cw(c151.48,-486.47) 151.48,-314.01 151.48,-314.15 1246,-314.15 1246,314.15 151.48,314.15 cw(c151.48,486.61)
GND on Bottom Layer "GND_L-01_P-001" (solid, remove dead copper, pour order 8): 85.79,327.07 85.79,-324.17 85.74,-327.04 cw(c151.39,-486.49) 151.4,-314.05 151.4,-314.19 1246,-314.19 1260,327.07 180,327.07 cw(c132.89,565.41)
GND on Mid-Layer 2 "VREG_L-01_P-001" (solid, remove dead copper, pour order 7): 85.82,327.1 85.82,-324.14 85.77,-327.01 cw(c151.43,-486.49) 151.43,-314.03 151.43,-314.16 1246,-314.16 1246,314.14 151.43,314.14 cw(c151.43,486.6)
GND on Top Layer "GND_L-01_P-001" (solid, remove dead copper, pour order 4): 85.87,327.12 85.87,-324.13 85.82,-327 cw(c151.48,-486.47) 151.48,-314.01 151.48,-314.15 1246,-314.15 1246,314.15 151.48,314.15 cw(c151.48,486.61)

## Keep-outs
Keep-Out Layer:
  the board outline again, w10

## Other copper
Top Layer:
  rectangle net Vrect: 295,85 330,100
  rectangle net GND: -33.37,54.29 6,2886.05
  rectangle net NetC13_2: 295,-45 330,-30
  rectangle net NetCs2_1: 174.8,-91.44 193.8,-43.44
  rectangle net NetCs1_1: 175,20 194,68
  rectangle net NetCs1_2: 136,-53 155,35
  region net ANT: 5.37,-55.71 -34,-55.71 -34,-2887.47 5.37,-2887.47
  region net GND: 32,95 62,52.77 62,10 17,10 -25,41 -38,66 -32,92 -18,104 0,110 18,106
  region net ANT: 32,-95.5 70,-42.02 70,-10.5 17,-10.5 -25,-41.5 -38,-66.5 -32,-92.5 -18,-104.5 0,-110.5 18,-106.5
Bottom Layer:
  rectangle net GND: 15.89,53.03 135,90
  rectangle net ANT: -5,-105 135,-65

## Silkscreen, mask and mechanical layers (free items; w line width, h text height)
Top Overlay:
  text "University of Washington Sensor Systems Lab" at 4.72,1055 h60 r90
  text "WISP 6.0" at 4.13,-1660 h60 r90
Bottom Overlay:
  text "University of Washington Sensor Systems Lab" at -0.28,2105 h60 r90
  text "WISP 6.0" at 4.78,-1570 h60 r90
Mechanical 1:
  the board outline again, w10